# EAGLE board Rpi board (EAGLE 9.1.2)
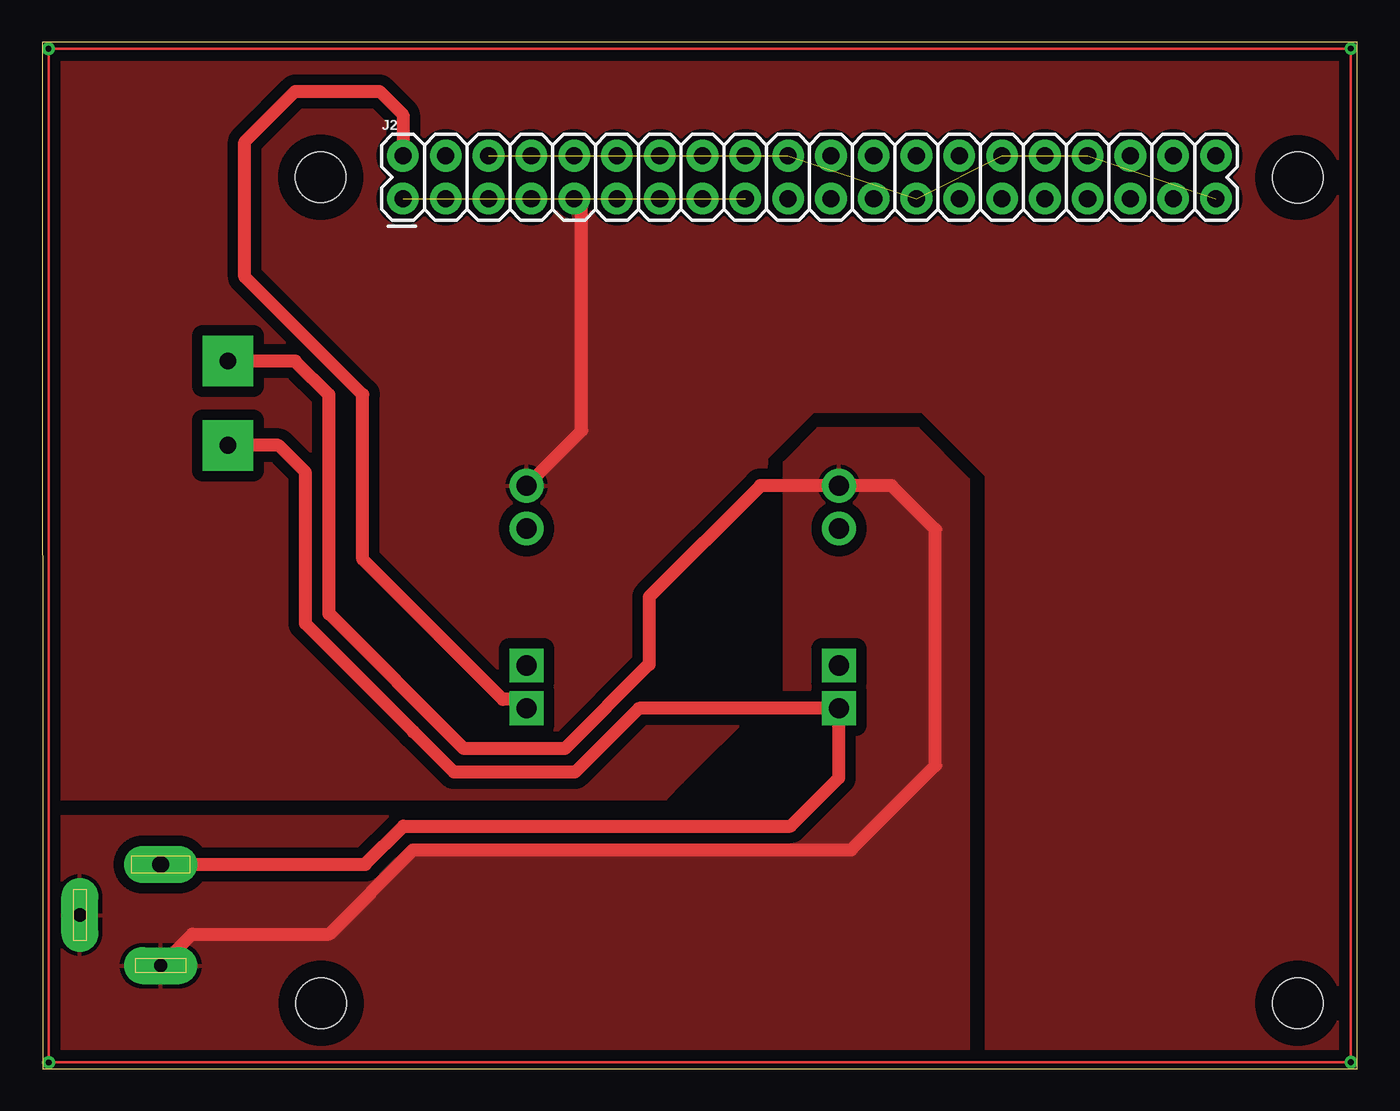
[diagram p0: board, top side]
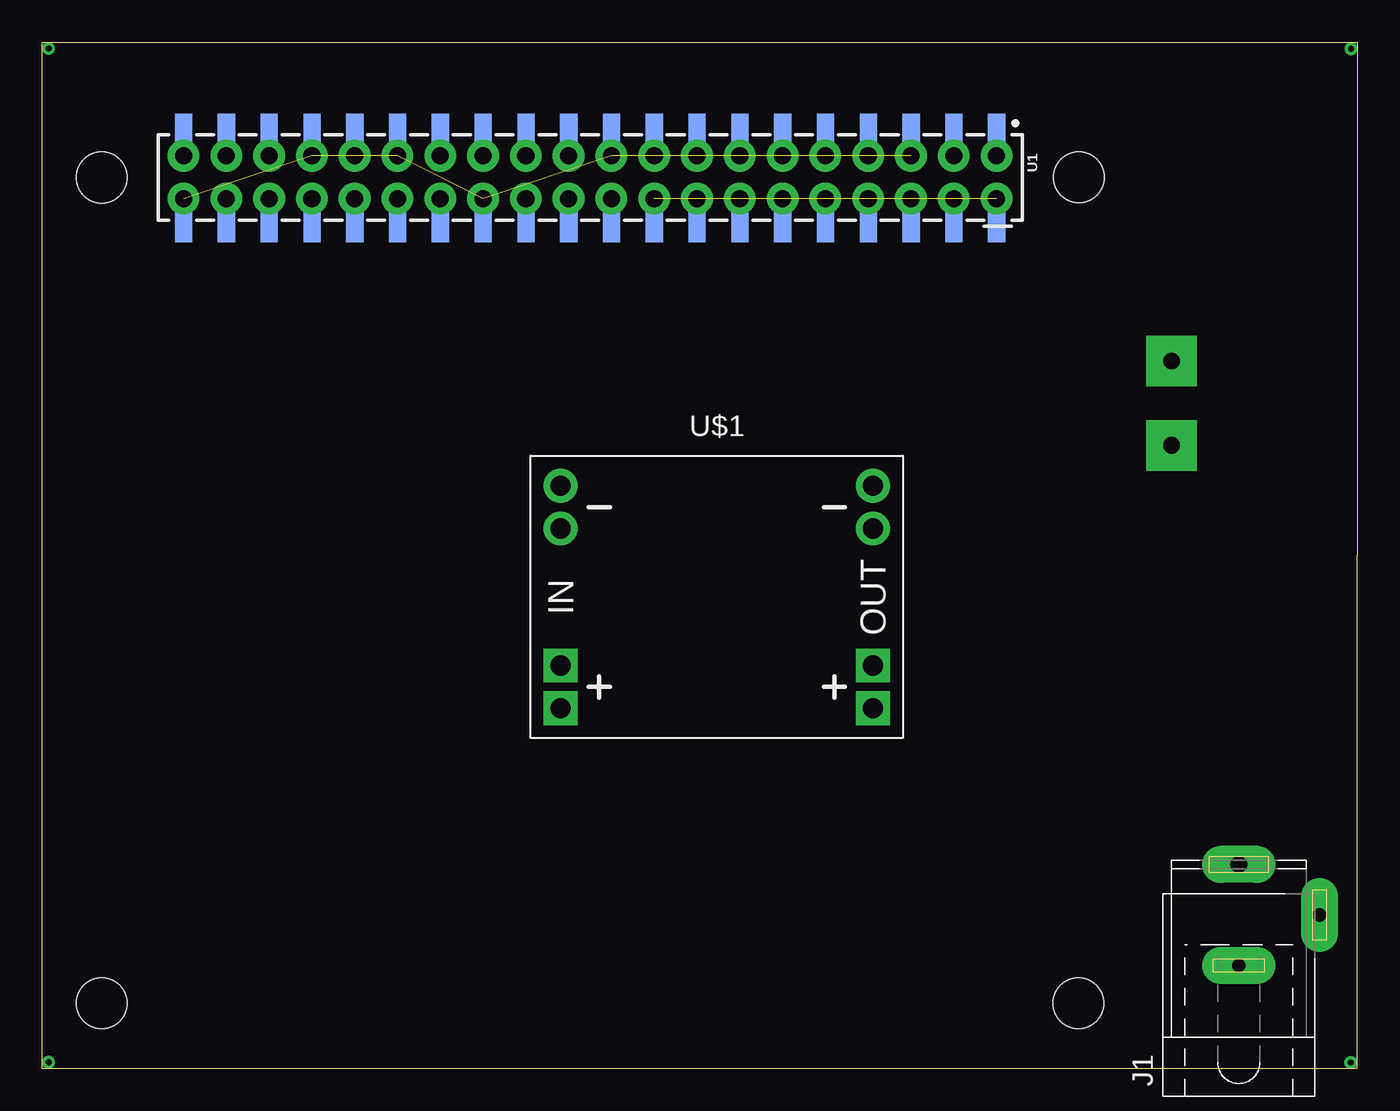
[diagram p1: board, bottom side, seen from below]

Size 78.06 x 60.91 mm. Coordinates in mm from the lower left corner, seen from the top.
Outline: 0.02,0 78.06,0 78.05,60.91 0,60.91 0.02,0
Copper layers (1*16): Top 0.035mm / dielectric 1.5mm / Bottom 0.035mm
Design rules "default": minimum track width 6mil, minimum drill 0.35mm, track to track 6mil, track to pad 6mil, pad to pad 6mil, via to via 6mil, smd to smd 6mil, copper to edge 40mil, drill to drill 6mil, minimum pad ring 10mil, minimum via ring 8mil, stop-mask expansion 4mil, vias tented up to drill 0mil, thermal gap 10mil
Net classes: 1 Power: width 0.762 mm, drill 0.762 mm, clearance 0.635 mm
Holes 3 mm at 16.53,52.9 16.55,3.89 74.53,3.9 74.53,52.89

## Footprints (pad centres in the part's own frame; a part is rotated, then mirrored left to right if it is on the bottom)
SPC4078 = drill 0.8 pad 2.184 long: 1 -3,0; 2 0,-4.8 | drill 1 pad 2.184 long: 3 3,0
2X20 = drill 1.016 pad 1.88: 1 0,0; 2 0,2.54; 3 2.54,0; 4 2.54,2.54; 5 5.08,0; 6 5.08,2.54; 7 7.62,0; 8 7.62,2.54; 9 10.16,0; 10 10.16,2.54; 11 12.7,0; 12 12.7,2.54; 13 15.24,0; 14 15.24,2.54; 15 17.78,0; 16 17.78,2.54; 17 20.32,0; 18 20.32,2.54; 19 22.86,0; 20 22.86,2.54; 21 25.4,0; 22 25.4,2.54; 23 27.94,0; 24 27.94,2.54; 25 30.48,0; 26 30.48,2.54; 27 33.02,0; 28 33.02,2.54; 29 35.56,0; 30 35.56,2.54; 31 38.1,0; 32 38.1,2.54; 33 40.64,0; 34 40.64,2.54; 35 43.18,0; 36 43.18,2.54; 37 45.72,0; 38 45.72,2.54; 39 48.26,0; 40 48.26,2.54
RASPBERRY_PI_SHIELD_NOHOLES = smd 1.02 x 1.87: 1 8.382,7.686; 2 8.382,1.929; 3 10.922,7.686; 4 10.922,1.929; 5 13.462,7.686; 6 13.462,1.929; 7 16.002,7.686; 8 16.002,1.929; 9 18.542,7.686; 10 18.542,1.929; 11 21.082,7.686; 12 21.082,1.929; 13 23.622,7.686; 14 23.622,1.929; 15 26.162,7.686; 16 26.162,1.929; 17 28.702,7.686; 18 28.702,1.929; 19 31.242,7.686; 20 31.242,1.929; 21 33.782,7.686; 22 33.782,1.929; 23 36.322,7.686; 24 36.322,1.929; 25 38.862,7.686; 26 38.862,1.929; 27 41.402,7.686; 28 41.402,1.929; 29 43.942,7.686; 30 43.942,1.929; 31 46.482,7.686; 32 46.482,1.929; 33 49.022,7.686; 34 49.022,1.929; 35 51.562,7.686; 36 51.562,1.929; 37 54.102,7.686; 38 54.102,1.929; 39 56.642,7.686; 40 56.642,1.929
DC-DC-STEP-DOWN-MP1584 = drill 1.2 pad 2 square: IN+.1 -9.271,-4.064; IN+.2 -9.271,-6.604; OUT+.1 9.271,-4.064; OUT+.2 9.271,-6.604 | drill 1.2 pad 2: IN-.1 -9.271,6.604; IN-.2 -9.271,4.064; OUT-.1 9.271,6.604; OUT-.2 9.271,4.064

## Placement (x,y rotation side)
J1  [SPC4078]  7.03,9.13 90 bottom
J2  RASPBERRYPI-40-PIN-GPIO_PTH_NO_SHROUD  [2X20]  21.41,51.64 0 top
U1  RASPBERRY_PI_40NOHOLES  [RASPBERRY_PI_SHIELD_NOHOLES]  13.02,57.68 180 bottom
U$1  DC-DC-STEP-DOWN-MP1584  [DC-DC-STEP-DOWN-MP1584]  38.02,28 0 bottom

## Library data of the parts
J1 = con-jack; OC_FARNELL: unknown; OC_NEWARK: unknown
J2 U1 = SparkFun-Connectors
U$1 = GHIdiy-modules

## Nets
3.3V: J2.1 J2.17
5V: J2.4
GND [Power]: J2.6 J2.14 J2.20 J2.25 J2.30 J2.34 J2.39
N$2 [Power]: J1.1 J1.2 U$1.IN-.1
N$3 [Power]: J2.2 U$1.OUT+.2
N$4: J1.3 U$1.IN+.2
N$5 [Power]: J2.9 U$1.OUT-.1

## Tracks (layer width: path | path; a pad name or v marks a point on that pad's centre or on a via)
3.3V  (1 unrouted)
GND  (6 unrouted)
N$1  (via drill 0.35)
  Top 0.152: v0.37,60.52 77.66,60.52 v77.68,60.55 v77.68,0.39 v77.68,0.38 v0.4,0.38 v0.39,0.38 0.39,60.5 v0.37,60.52
N$2  (via drill 1 pad 3)
  Top 0.762: J1.1 8.9,8 17.02,8 22.02,13 48.02,13 53.02,18 53.02,32 50.41,34.6 U$1.IN-.1 42.62,34.6 36.02,28 36.02,24 31.02,19 25.02,19 17.02,27 17.02,40 15.02,42 v11.02,42
  pour Top: 1.02,15 40.02,15 44.02,19 44.02,36 46.02,38 52.02,38 55.02,35 55.02,0 -0.98,0 -1.98,1 -1.98,14 -0.98,15
N$3
  Top 0.762: J2.2 21.41,56.61 20.02,58 15.02,58 12.02,55 12.02,47 19.02,40 19.02,30.23 27.32,21.92 28.22,21.92 U$1.OUT+.2
N$4  (via drill 1 pad 3)
  Top 0.762: J1.3 19.17,12.13 21.44,14.4 44.41,14.4 47.29,17.27 U$1.IN+.2 35.41,21.4 31.62,17.6 24.44,17.6 22.04,20 22.02,20 22.02,20.02 15.62,26.42 15.62,35.4 14.02,37 v11.02,37
N$5
  Top 0.762: U$1.OUT-.1 32.02,37.88 32.02,51.19 J2.9
  pour Top: 0.02,61 78.02,61 78.02,0 57.02,0 56.02,1 56.02,35.16 52.18,39 45.81,39 43.02,36.21 42.42,21.4 42.42,21.4 38.02,17 37.02,16 0.02,16